# Altium PCB PCB2.PcbDoc (part 1 of 2)
Units mil, origin at the board's own origin, x right, y up, seen from the top; angles counter-clockwise.
Board outline 3858.8 x 3858.8 mil, 4 copper layers (Top Layer, signe1, GND, Bottom Layer), stack 23.756 mil thick; 111 components, 78 nets, 389 pads, 281 vias.
Unrouted connection lines stored in the file: 91.
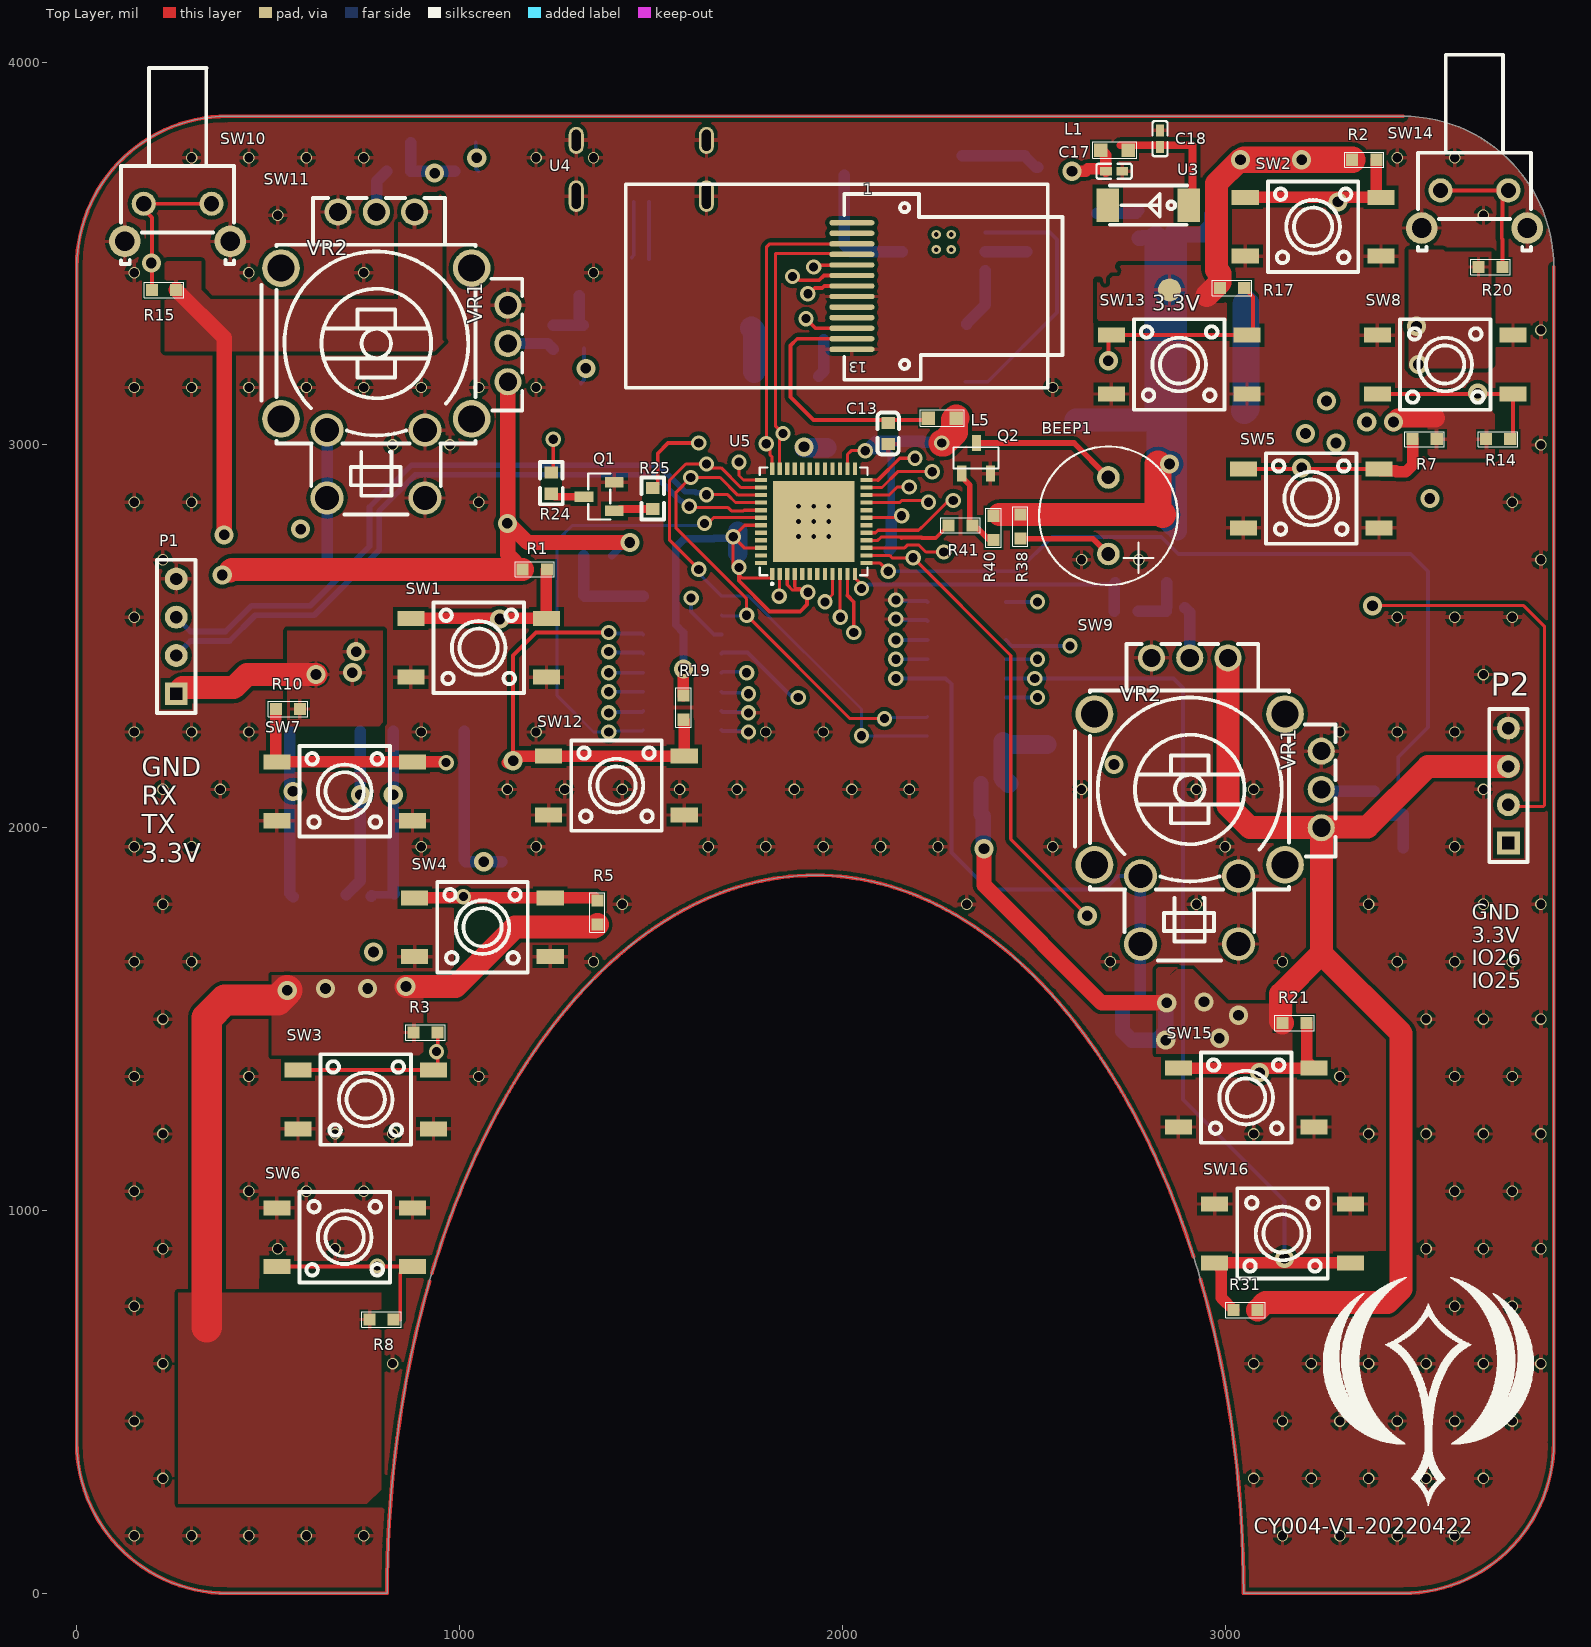
[diagram p0: Top Layer view]
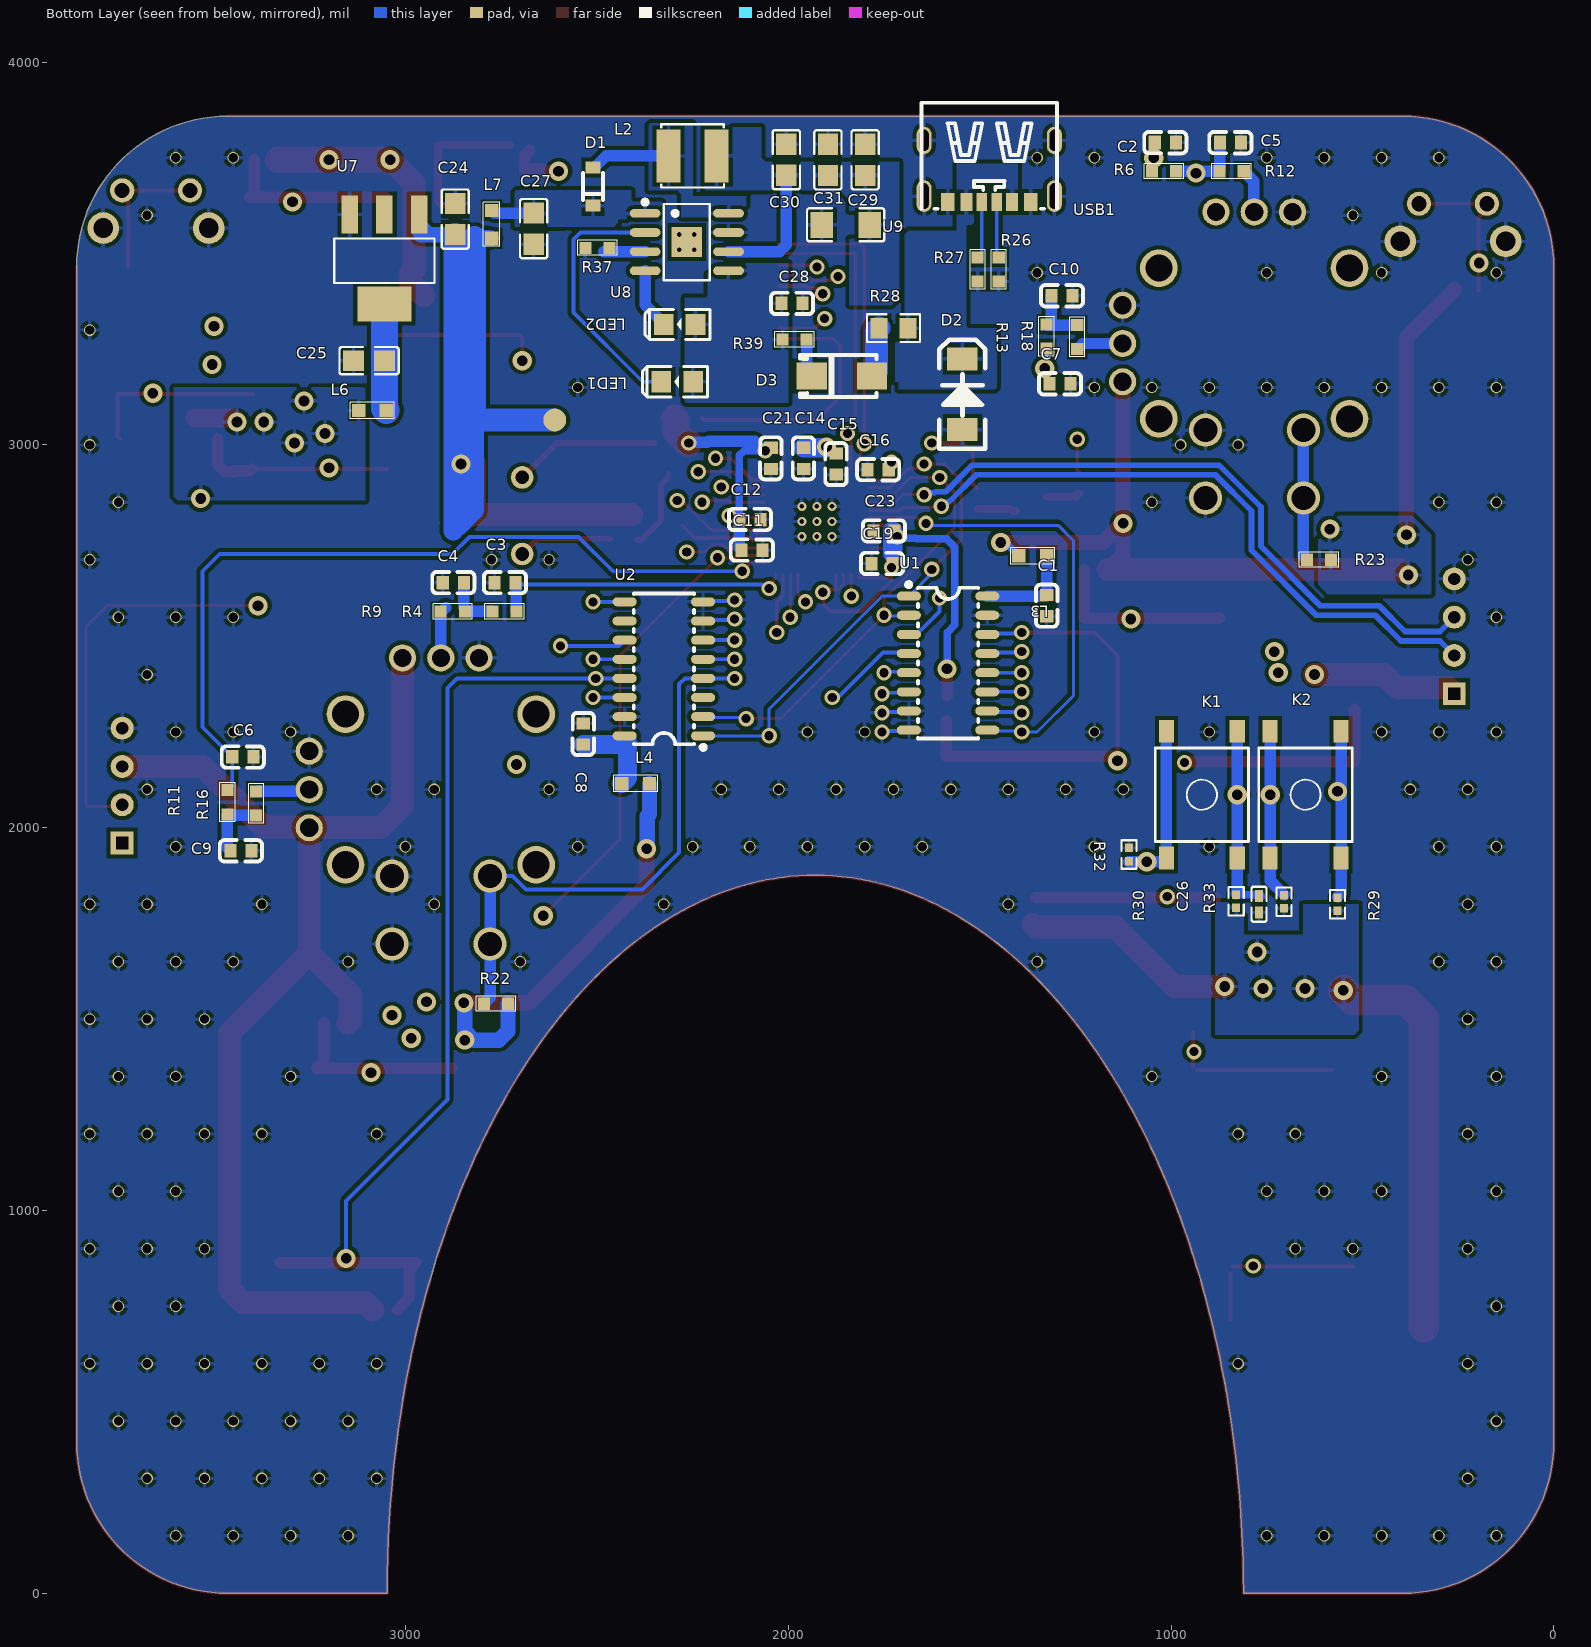
[diagram p1: Bottom Layer view, seen from below]
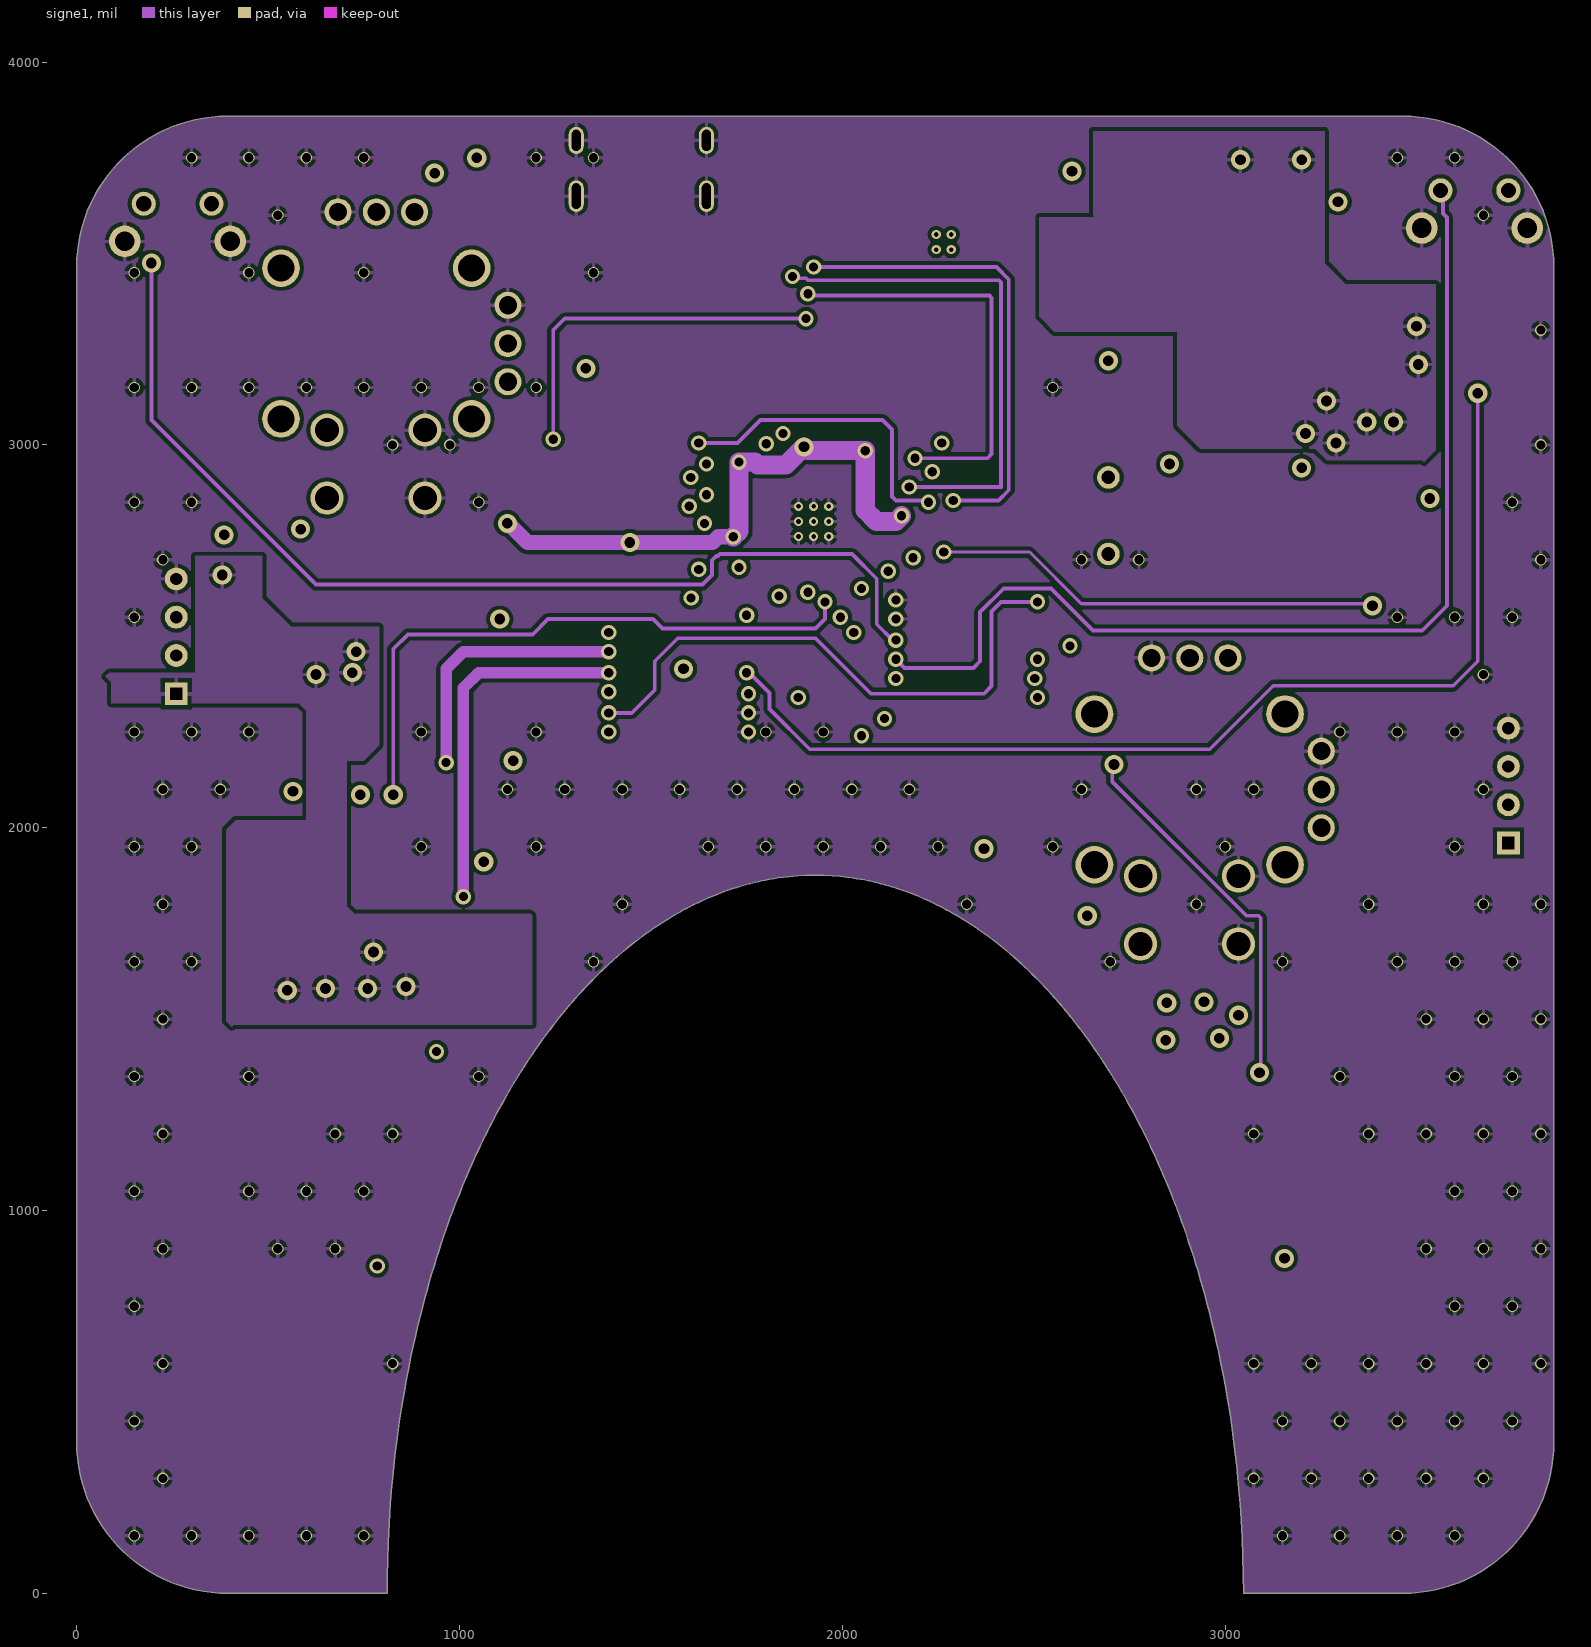
[diagram p2: signe1]
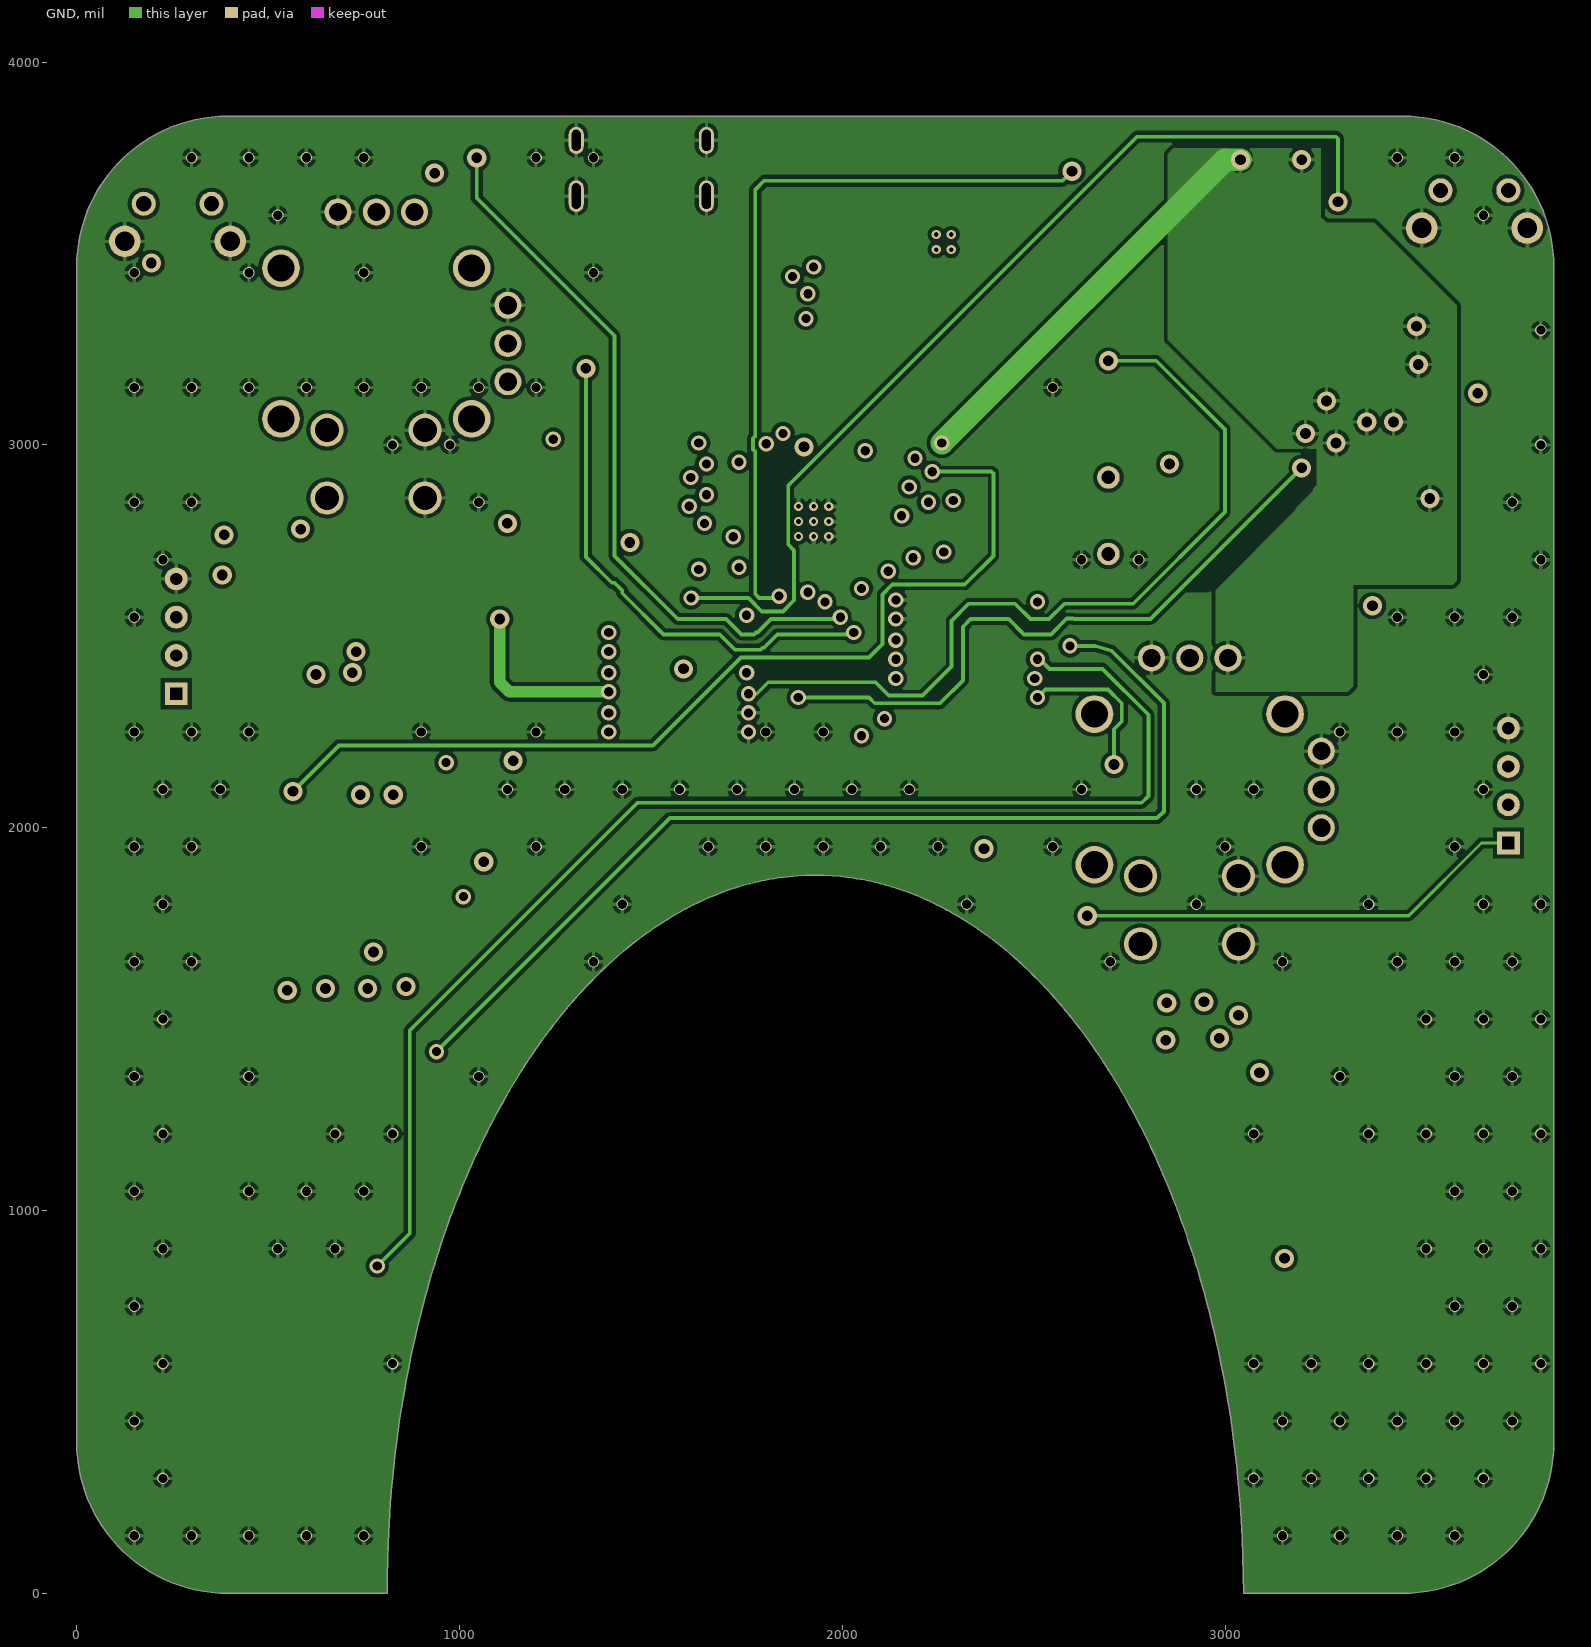
[diagram p3: GND]

## Layer stack, top to bottom
Top Solder: solder mask 0.4, Solder Resist, Dk 3.5
Top Layer: signal copper 1.4
Dielectric 2: prepreg 2.8, PP-006, Dk 4.1
signe1: signal copper 1.378
Dielectric 1: dielectric 12.6, FR-4, Dk 4.8
GND: signal copper 1.378
Dielectric 3: prepreg 2.8, PP-006, Dk 4.1
Bottom Layer: signal copper 1.4
Bottom Solder: solder mask 0.4, Solder Resist, Dk 3.5

## Board outline
739 vertices, not listed, extent -0.01,-0.02 3858.78,3858.78

## Design rules (kind name [scope] priority, off if disabled: settings)
Clearance [All] p1: gap=10 ignorepadtopadclearanceinfootprint=TRUE
PolygonConnect [All] p1: connectstyle=Relief reliefconductorwidth=10 reliefentries=4 polygonreliefangle="90 Angle" airgapwidth=10
RoutingVias [All] p1: holewidth=24 width=28 viastyle="Through Hole" minholewidth=10 minwidth=18 maxholewidth=28 maxwidth=50
SolderMaskExpansion [All] p1: expansion=4
Width [All] p1: maxlimit=100 minlimit=5 preferedwidth=8
30 further rules are at their usual default settings.

## Components (designator, comment, footprint, x,y, rotation, side; value= is the part's Value field where it differs from the comment)
BEEP1 "BEEP-9.5X5.5" BEEP-9.5X5.5 2695,2815 r90 top
C1 "C0603" C0603 1325,2580 r90 bottom
C2 "C0603" C0603 1015,3790 r180 bottom
C3 "C0603" C0603 2740,2640 r0 bottom
C4 "C0603" C0603 2875,2640 r0 bottom
C5 "C0603" C0603 845,3790 r180 bottom
C6 "C0603" C0603 3425,2185 r180 bottom
C7 "C0603" C0603 1290,3160 r180 bottom
C8 "C0603" C0603 2535,2245 r270 bottom
C9 "C0603" C0603 3430,1940 r180 bottom
C10 "C0603" C0603 1285,3390 r180 bottom
C11 "C0603" C0603 2095,2725 r0 bottom
C12 "C0603" C0603 2100,2805 r0 bottom
C13 "C0603" C0603 2120,3030 r270 top
C14 "C0603" C0603 1960,2965 r270 bottom
C15 "C0603" C0603 1875,2950 r270 bottom
C16 "C0603" C0603 1765,2935 r0 bottom
C17 "2pF" C0402 2710,3715 r180 top
C18 "2pF" C0402 2830,3800 r270 top
C19 "C0603" C0603 1755,2690 r0 bottom
C21 "C0603" C0603 2045,2965 r270 bottom
C23 "C0603" C0603 1750,2775 r0 bottom
C24 "C0805" C0805 2870,3590 r90 bottom
C25 "C0805" C0805 3095,3220 r0 bottom
C26 "C0402" C0402 770,1800 r90 bottom value=0.1UF
C27 "C0805" C0805 2665,3565 r90 bottom
C28 "C0603" C0603 1990,3370 r180 bottom
C29 "C0805" C0805 1799.13,3744.69 r90 bottom
C30 "C0805" C0805 2005,3745 r90 bottom
C31 "C0805" C0805 1896.28,3744.69 r90 bottom
D1 "1N5819" SOD-323 2510,3675 r90 bottom
D2 "SMAJ5.0CA" DO-214 1545,3040 r90 bottom
D3 "SS34_C2909963" SMA_L4.2-W2.7-LS5.0-RD 1860,3180 r180 bottom
K1 "KEY" SW6.2/6.2-SMD 919.52,2086.12 r90 bottom
K2 "KEY" SW6.2/6.2-SMD 648.43,2086.12 r90 bottom
L1 "2.4nH" L0603 2710,3770 r0 top
L2 "10uH" IND-SMD_L4.0-W4.0 2250,3755 r0 bottom
L3 "L0603" L0603 1360,2710 r0 bottom value=120R/0603
L4 "L0603" L0603 2400,2115 r180 bottom value=120R/0603
L5 "L0603" L0603 2260,3070 r0 top value=120R/0603
L6 "L0603" L0603 3085,3090 r0 bottom value=120R/0603
L7 "L0603" L0603 2775,3575 r90 bottom value=120R/0603
LED1 "BLUE" LED0805_RED 2290,3165 r0 bottom
LED2 "BLUE" LED0805_RED 2283.65,3315 r0 bottom
P1 "2.54-1*4P_JX" 2.54-1*4P_TIGHT_JX 260,2500 r90 top
P2 "2.54-1*4P_JX" 2.54-1*4P_TIGHT_JX 3740,2110 r90 top
Q1 "SS8050" SOT-23-3_L2.9-W1.3-P1.90-LS2.4-BR 1365,2865 r0 top
Q2 "S8050" SOT-23 2312,2925 r0 top
R1 "R0603" R_0603 1165,2675 r0 top value=4.7K
R2 "R0603" R_0603 3332.01,3745 r0 top value=4.7K
R3 "R0603" R_0603 880,1465 r0 top value=4.7K
R4 "R0603" R_0603 2710,2565 r0 bottom value=1K
R5 "R0603" R_0603 1360,1747.01 r90 top value=4.7K
R6 "R0603" R_0603 1050,3715 r180 bottom value=1K
R7 "R0603" R_0603 3552.99,3015 r180 top value=4.7K
R8 "R0603" R_0603 765,715 r0 top value=4.7K
R9 "R0603" R_0603 2907.99,2565 r180 bottom value=1K
R10 "R0603" R_0603 582.99,2310 r180 top value=4.7K
R11 "R0603" R_0603 3465,2097.99 r270 bottom value=1K
R12 "R0603" R_0603 810,3715 r0 bottom value=1K
R13 "R0603" R_0603 1325,3252.01 r90 bottom value=1K
R14 "R0603" R_0603 3682.01,3015 r0 top value=4.7K
R15 "R0603" R_0603 260,3405 r180 top value=4.7K
R16 "R0603" R_0603 3390,2095 r270 bottom value=1K
R17 "R0603" R_0603 2987.01,3410 r0 top value=4.7K
R18 "R0603" R_0603 1245,3250 r90 bottom value=1K
R19 "R0603" R_0603 1585,2345 r270 top value=4.7K
R20 "R0603" R_0603 3662.01,3465 r0 top value=4.7K
R21 "R0603" R_0603 3150,1490 r0 top value=4.7K
R22 "R0603" R_0603 2795,1540 r180 bottom value=1K
R23 "R0603" R_0603 645,2700 r180 bottom value=1K
R24 "10R" R0603 1240,2900 r270 top
R25 "1K" R0603 1505,2860 r270 top
R26 "R0603" R_0603 1450,3427.01 r90 bottom value=5.1K/NC
R27 "R0603" R_0603 1505,3427.01 r90 bottom value=5.1K/NC
R28 "R0603" R0805 1725,3305 r180 bottom value=1K
R29 "R0402" R0402 565,1800 r270 bottom
R30 "R0402" R0402 830,1807.96 r270 bottom
R31 "R0603" R_0603 3085,740 r180 top value=4.7K
R32 "R0402" R0402 1110,1930 r270 bottom
R33 "R0402" R0402 704.63,1806.33 r90 bottom
R37 "R0603" R_0603 2530,3515 r180 bottom value=1K
R38 "R0603" R_0603 2465,2755 r90 top value=1K
R39 "R0603" R_0603 1952.01,3275 r0 bottom value=1K
R40 "R0603" R_0603 2395,2752.01 r90 top value=1K
R41 "R0603" R_0603 2277.01,2790 r0 top value=1K
SW1 "K2-6639SP-C4SC-04" KEY-SMD_4P-L6.0-W6.0-P3.90-LS10.0 1050,2470 r0 top
SW2 "K2-6639SP-C4SC-04" KEY-SMD_4P-L6.0-W6.0-P3.90-LS10.0 3230,3570 r0 top
SW3 "K2-6639SP-C4SC-04" KEY-SMD_4P-L6.0-W6.0-P3.90-LS10.0 755,1290 r0 top
SW4 "K2-6639SP-C4SC-04" KEY-SMD_4P-L6.0-W6.0-P3.90-LS10.0 1060,1740 r0 top
SW5 "K2-6639SP-C4SC-04" KEY-SMD_4P-L6.0-W6.0-P3.90-LS10.0 3225,2860 r0 top
SW6 "K2-6639SP-C4SC-04" KEY-SMD_4P-L6.0-W6.0-P3.90-LS10.0 700,930 r180 top
SW7 "K2-6639SP-C4SC-04" KEY-SMD_4P-L6.0-W6.0-P3.90-LS10.0 700,2095 r0 top
SW8 "K2-6639SP-C4SC-04" KEY-SMD_4P-L6.0-W6.0-P3.90-LS10.0 3575,3210 r180 top
SW9 "THB001P" SW-TH_THB001P 2955,2070 r0 top
SW10 "K2-6639SP-C4SC-04" SW-TH_KH-6X6X9H-ZJ 263.58,3580.79 r180 top
SW11 "THB001P" SW-TH_THB001P 830,3235 r0 top
SW12 "K2-6639SP-C4SC-04" KEY-SMD_4P-L6.0-W6.0-P3.90-LS10.0 1410,2110 r0 top
SW13 "K2-6639SP-C4SC-04" KEY-SMD_4P-L6.0-W6.0-P3.90-LS10.0 2880,3210 r0 top
SW14 "K2-6639SP-C4SC-04" SW-TH_KH-6X6X9H-ZJ 3651.41,3615.79 r180 top
SW15 "K2-6639SP-C4SC-04" KEY-SMD_4P-L6.0-W6.0-P3.90-LS10.0 3055,1295 r0 top
SW16 "K2-6639SP-C4SC-04" KEY-SMD_4P-L6.0-W6.0-P3.90-LS10.0 3150,940 r180 top
U1 "74HC165N" SOP-16_L9.9-W3.9-P1.27-LS6.1-BL 1582.36,2430 r270 bottom
U2 "74HC165N" SOP-16_L9.9-W3.9-P1.27-LS6.1-BL 2325,2415 r90 bottom
U3 "CA-C03" ANT2051 2799.43,3626.18 r180 top
U4 "0.96 TFT" "0.96 LCD" 2025,3415.12 r180 top
U5 "ESP32-PICO-D4" QFN-48_L7.0-W7.0-P0.50-BL-EP5.4 1925,2800 r0 top
U7 "AMS1117-3.3" SOT-223-3_L6.5-W3.4-P2.30-LS7.0-BR 3055,3485 r90 bottom
U8 "TP5400" SOIC-8_L5.0-W4.0-P1.27-LS6.0-BL-EP2.0 2265,3530 r270 bottom
U9 "BAT" C1206 1850,3575 r0 bottom
USB1 "TYPE-C-31-M-16" TYPE-C-SMD_TYPE-C-31-M-16 1475,3715 r0 bottom

## Footprints (in the part's own frame and the unit in brackets; to place one, negate y for a bottom-side part, rotate by r counter-clockwise, add the part's x,y. Pads: shape width x height; smd on the part's side, far side on the other; paste and mask are expansions set on the pad)
"0.96 LCD" [mm]
  oval 3x0.35 smd: 1(0,-4.2) 2(0,-3.5) 3(0,-2.8) 4(0,-2.1) 5(0,-1.4) 6(0,-0.7) 7(0,0) 8(0,0.7) 9(0,1.4) 10(0,2.1) 11(0,2.8) 12(0,3.5) 13(0,4.2)
  silkscreen extent -13.97,-6.75 15,6.75
2.54-1*4P_TIGHT_JX [mm]
  rect 1.52x1.52 hole 0.81 square: 1(-3.81,0)
  round 1.52 hole 0.81: 2(-1.27,0) 3(1.27,0) 4(3.81,0)
  silkscreen extent -5.08,-1.27 5.08,1.27
ANT2051 [mm]
  rect 1.5x2.2 smd: 1(-2.69,0) 2(2.69,0)
  silkscreen extent -2.56,-1.3 2.55,1.3
BEEP-9.5X5.5 [mm]
  round 1.5 hole 0.9: 1(-2.54,0) 2(2.54,0)
  silkscreen extent -4.6,-4.6 4.6,4.6
C0402 [mm]
  rect 0.79x0.54 smd: 1(-0.545,0) 2(0.545,0)
  silkscreen extent -1.17,-0.5 1.17,0.5
C0603 [mm]
  rect 0.8x0.9 smd: 1(0.7,0) 2(-0.7,0)
  silkscreen extent -1.4,-0.72 1.4,0.7
C0805 [mm]
  rect 1.41x1.35 smd: 1(-1.03,0) 2(1.03,0)
  silkscreen extent -1.96,-0.9 1.96,0.9
C1206 [mm]
  rect 1.485x1.728 smd: 1(-1.593,0) 2(1.593,0)
  silkscreen extent -2.56,-1.09 2.56,1.09
DO-214 [mil]
  rect 60x80 smd: 1(0,0) 2(185,0)
  silkscreen extent -50,-60 235,60
IND-SMD_L4.0-W4.0 [mm]
  rect 1.6x3.5 smd: 1(-1.6,0) 2(1.6,0)
  silkscreen extent -2.08,-2.1 2.08,2.1
KEY-SMD_4P-L6.0-W6.0-P3.90-LS10.0 [mm]
  rect 1.8x1 smd: 1(-4.5,1.95) 2(4.5,1.95) 3(-4.5,-1.95) 4(4.5,-1.95)
  silkscreen extent -3,-3 3,3
L0603 [mil]
  rect 35x35 smd: 1(-35,0) 2(37.49,0)
  silkscreen extent -56,-21 59,22
LED0805_RED [mil]
  rect 51.2x55.1 smd: 1(-41.35,0) 2(41.35,0)
  silkscreen extent -79,-39 91,39
QFN-48_L7.0-W7.0-P0.50-BL-EP5.4 [mm]
  rect 0.28x0.8 smd: 1(-2.75,-3.5) 2(-2.25,-3.5) 3(-1.75,-3.5) 4(-1.25,-3.5) 5(-0.75,-3.5) 6(-0.25,-3.5) 7(0.25,-3.5) 8(0.75,-3.5) 9(1.25,-3.5) 10(1.75,-3.5) 11(2.25,-3.5) 12(2.75,-3.5) 25(2.75,3.5) 26(2.25,3.5) 27(1.75,3.5) 28(1.25,3.5) 29(0.75,3.5) 30(0.25,3.5) 31(-0.25,3.5) 32(-0.75,3.5) 33(-1.25,3.5) 34(-1.75,3.5) 35(-2.25,3.5) 36(-2.75,3.5)
  rect 0.8x0.28 smd: 13(3.5,-2.75) 14(3.5,-2.25) 15(3.5,-1.75) 16(3.5,-1.25) 17(3.5,-0.75) 18(3.5,-0.25) 19(3.5,0.25) 20(3.5,0.75) 21(3.5,1.25) 22(3.5,1.75) 23(3.5,2.25) 24(3.5,2.75) 37(-3.5,2.75) 38(-3.5,2.25) 39(-3.5,1.75) 40(-3.5,1.25) 41(-3.5,0.75) 42(-3.5,0.25) 43(-3.5,-0.25) 44(-3.5,-0.75) 45(-3.5,-1.25) 46(-3.5,-1.75) 47(-3.5,-2.25) 48(-3.5,-2.75)
  rect 5.4x5.4 smd: 49(0,0)
  silkscreen extent -3.58,-4.21 3.58,3.58
R0402 [mm]
  rect 0.566x0.54 smd: 1(-0.433,0) 2(0.433,0)
  silkscreen extent -0.94,-0.5 0.94,0.5
R0603 [mm]
  rect 0.8x0.9 smd: 1(0.7,0) 2(-0.7,0)
  silkscreen extent -1.4,-0.76 1.4,0.75
R0805 [mil]
  rect 44.59x54.21 smd: 1(-38.04,0) 2(38.04,0)
  silkscreen extent -69,-36 69,36
R_0603 [mm]
  rect 0.8x0.8 smd: 1(0,0) 2(1.6,0)
  silkscreen extent -0.51,-0.51 2.11,0.51
SMA_L4.2-W2.7-LS5.0-RD [mm]
  rect 2x1.8 smd: 1(-2,0) 2(2,0)
  silkscreen extent -2.79,-1.4 2.3,1.4
SOD-323 [mm]
  rect 0.8x1 smd: 1(1.27,0) 2(-1.27,0)
  silkscreen extent -0.89,-0.66 0.89,0.66
SOIC-8_L5.0-W4.0-P1.27-LS6.0-BL-EP2.0 [mm]
  oval 0.574x2.038 smd: 1(-1.905,-2.769) 2(-0.635,-2.769) 3(0.635,-2.769) 4(1.905,-2.769) 5(1.905,2.769) 6(0.635,2.769) 7(-0.635,2.769) 8(-1.905,2.769)
  rect 2x2 smd: 9(0,0)
  silkscreen extent -2.79,-2.92 2.53,1.52
SOP-16_L9.9-W3.9-P1.27-LS6.1-BL [mm]
  oval 0.6x1.6 smd: 1(-4.445,-2.6) 2(-3.175,-2.6) 3(-1.905,-2.6) 4(-0.635,-2.6) 5(0.635,-2.6) 6(1.905,-2.6) 7(3.175,-2.6) 8(4.445,-2.6) 9(4.445,2.6) 10(3.175,2.6) 11(1.905,2.6) 12(0.635,2.6) 13(-0.635,2.6) 14(-1.905,2.6) 15(-3.175,2.6) 16(-4.445,2.6)
  silkscreen extent -5.36,-2.76 5,2
SOT-23 [mm]
  rect 0.6x1.05 smd: 1(0,0) 2(1.9,0) 3(0.965,2.032)
  silkscreen extent -0.55,0.35 2.45,1.75
SOT-23-3_L2.9-W1.3-P1.90-LS2.4-BR [mm]
  rect 1.25x0.7 smd: 1(1,-0.95) 2(1,0.95) 3(-1,0)
  silkscreen extent -0.73,-1.53 0.73,1.53
SOT-223-3_L6.5-W3.4-P2.30-LS7.0-BR [mm]
  rect 2.5x1.1 smd: 1(2.97,-2.3) 2(2.97,0) 3(2.97,2.3)
  rect 2.34x3.6 smd: 4(-2.97,0)
  silkscreen extent -1.57,-3.33 1.37,3.33
SW6.2/6.2-SMD [mm]
  rect 1.5x1 smd: 1(-4.2,2.35) 2(4.2,2.35) 3(-4.2,-2.35) 4(4.2,-2.35)
  silkscreen extent -3.1,-3.1 3.1,3.1
SW-TH_KH-6X6X9H-ZJ [mm]
  round 1.6 hole 1: 1(-2.25,-1.25) 2(2.25,-1.25)
  round 2.1 hole 1.3: 3(-3.5,1.25) 4(3.5,1.25)
  silkscreen extent -3.75,-10.25 3.75,2.75
SW-TH_THB001P [mm]
  round 1.8 hole 1.2: 1(7.527,-1.78) 2(7.527,0.76) 3(7.527,3.3) 4(1.337,9.49) 5(-1.203,9.49) 6(-3.743,9.49)
  round 2.5 hole 1.8: 7(-7.527,5.76) 8(-7.527,-4.24) 9(5.123,-4.24) 10(5.123,5.76)
  round 2.2 hole 1.6: a(-4.472,-4.99) b(2.028,-4.99) c(-4.472,-9.49) d(2.028,-9.49)
  silkscreen extent -8.82,-10.58 8.48,10.42
TYPE-C-SMD_TYPE-C-31-M-16 [mm]
  oval 1x2.1 hole 0.6 slot 1.7 at 90 deg: 1(-4.32,1.65) 2(4.32,1.65)
  oval 1x1.8 hole 0.6 slot 1.4 at 90 deg: 3(-4.32,-2.05) 4(4.32,-2.05)
  rect 0.7x1.2 smd: A5(-0.5,2.05) B5(0.5,2.05)
  rect 0.8x1.2 smd: A9(1.52,2.05) B9(-1.52,2.05)
  rect 0.9x1.2 smd: A12(2.75,2.05) B12(-2.75,2.05)
  silkscreen extent -4.5,-4.55 4.5,2.49

## Part data
C1 C2 C3 C4 C5 C6 C7 C8 C9 C10 C11 C12 C13 C14 C15 C16 C19 C21 C23 C28: BOM_Manufacturer="Samsung Electro-Mechanics", BOM_Manufacturer Part=10uF, BOM_Supplier=LCSC, BOM_Supplier Part=C15415, Contributor=LCSC, nameAlias=Value, spicePre=C, spiceSymbolName=10UF
C24 C25 C27 C29 C30 C31: "Capacitor"
D1: "肖特基二极管"
D2: "500V  400W 稳压管", PCB DECAL=DO-214
D3: BOM_JLCPCB Part Class="Extended Part", BOM_Manufacturer=YONGYUTAI(ÓÀÔ, BOM_Manufacturer Part=SS34, BOM_Supplier=LCSC, BOM_Supplier Part=C2909963, Contributor=LCSC, spicePre=D, spiceSymbolName=SS34_C2909963
L2: BOM_JLCPCB Part Class="Extended Part", BOM_Manufacturer=Sunlord, BOM_Manufacturer Part=SWPA4030S100MT, BOM_Supplier=LCSC, BOM_Supplier Part=C38117, nameAlias=Inductance, spicePre=L, spiceSymbolName=SWPA4030S100MT
L3 L4 L5 L6 L7: "0603,BEAD", Manufacturer #1 PN=BEAD, PCB DECAL=L0603
LED1 LED2: library part LED_B
Q1: BOM_JLCPCB Part Class="Extended Part", BOM_Manufacturer=FUXINSEMI, BOM_Manufacturer Part=SS8050, BOM_Supplier=LCSC, BOM_Supplier Part=C908250, Contributor=LCSC, spicePre=Q, spiceSymbolName=SS8050
Q2: "NPN", Manufacturer #2=8050, PCB DECAL=SOT-23
R24 R25: BOM_JLCPCB Part Class="Extended Part", BOM_Manufacturer=UniOhm, BOM_Manufacturer Part=0603WAJ0000T5E, BOM_Supplier=LCSC, BOM_Supplier Part=C15402, nameAlias="Resistance (Ohms)", spicePre=R, spiceSymbolName=0603WAJ0000T5E
SW1 SW2 SW3 SW4 SW5 SW6 SW7 SW8 SW10 SW12 SW13 SW14 SW15 SW16: BOM_JLCPCB Part Class="Extended Part", BOM_Manufacturer=HRO, BOM_Manufacturer Part=K2-6639SP-C4SC-04, BOM_Supplier=LCSC, BOM_Supplier Part=C83206, spicePre=S, spiceSymbolName=K2-6639SP-C4SC-04
SW9 SW11: "摇杆开关", BOM_JLCPCB Part Class="Extended Part", BOM_Manufacturer=C&K, BOM_Manufacturer Part=THB001P, BOM_Supplier=LCSC, BOM_Supplier Part=C2685355, Contributor=LCSC, spicePre=S, spiceSymbolName=THB001P
U1 U2: "8位并行输入 输出寄存器", BOM_JLCPCB Part Class="Extended Part", BOM_Manufacturer=HGSEMI, BOM_Manufacturer Part=74HC165N, BOM_Supplier=LCSC, BOM_Supplier Part=C507183, Contributor=LCSC, spicePre=U, spiceSymbolName=74HC165N
U5: BOM_JLCPCB Part Class="Extended Part", BOM_Manufacturer="Espressif Systems", Frequency=-, BOM_Manufacturer Part=ESP32-PICO-D4, BOM_Supplier=LCSC, BOM_Supplier Part=C193707, Contributor=LCSC, spicePre=U, spiceSymbolName=ESP32-PICO-D4
U7: "LDO 800mA", BOM_JLCPCB Part Class="Basic Part", BOM_Manufacturer=AMS, BOM_Manufacturer Part=AMS1117-3.3, BOM_Supplier=LCSC, BOM_Supplier Part=C6186, sourceId=dwIGgezVh, spicePre=U, spiceSymbolName=AMS1117-3.3, timeStamp=1476261164
U8: "锂电池充放电", BOM_JLCPCB Part Class="Extended Part", BOM_Manufacturer=TOPPOWER, BOM_Manufacturer Part=TP5400, BOM_Supplier=LCSC, BOM_Supplier Part=C24154, spicePre=U, spiceSymbolName=TP5400
USB1: BOM_JLCPCB Part Class="Extended Part", BOM_Manufacturer="Korean Hroparts Elec", BOM_Manufacturer Part=TYPE-C-31-M-16, BOM_Supplier=LCSC, BOM_Supplier Part=C283541, Contributor=LCSC, spicePre=U, spiceSymbolName=TYPE-C-31-M-16
BEEP1: PCB DECAL=BEEP-9.5X5.5
C17 C18: Contributor=LCEDA_Lib, nameAlias=Value(F), spicePre=C, spiceSymbolName=C_0402_US
C26: PCB DECAL=CAP_0603_FIRE
K1 K2: Manufacturer #1 PN=KEY, PCB DECAL=SW6.2/6.2-SMD
L1: Contributor=LCEDA_Lib, nameAlias=Value(H), spicePre=L, spiceSymbolName=L0402_US
P1 P2: BOM_Supplier=LCSC, BOM_Supplier Part=C115245, spicePre=P, spiceSymbolName=2.54-1*4P_JX
R1 R2 R3 R4 R5 R6 R7 R8 R9 R10 R11 R12 R13 R14 R15 R16 R17 R18 R19 R20 R21 R22 R23 R26 R27 R28 R31 R37 R38 R39 R40 R41: PCB DECAL=R_0603
U3: Contributor=BVREAVE, link=https://item.taobao.com/item.htm?spm=a230r.1.14.4.81c453c0MSMjjx&id=627328734225&ns=1&abbucket=1#detail, spicePre=U, spiceSymbolName=ANT_CrossAir_CA-C03
U4: Contributor=FJ956391150, spicePre=U, spiceSymbolName="0.96 TFT"

## Free pads (board coordinates)
  round 60 smd: 2(2855,3405)
  round 60 smd far side: 3(2610,3065)

## Via types
v1: diameter 30, hole 24, Top Layer to Bottom Layer, 153 vias
v2: diameter 40, hole 24, Top Layer to Bottom Layer, 63 vias
v3: diameter 50, hole 28, Top Layer to Bottom Layer, 52 vias
v4: diameter 24.02, hole 12, Top Layer to Bottom Layer, 9 vias
v5: diameter 24, hole 12, Top Layer to Bottom Layer, 4 vias

## Nets (pads, with @x,y where several pads share a name; then routed paths per layer and width w, separated by ;. In a path a pad name is that pad's centre, name@x,y a point inside that pad or via, vN(x,y) a via of type N, cw(c..) or ccw(c..) an arc to the next point about the centre after c; other vN are vias at no path point)
3.3V: C11.1 C12.1 C14.2 C15.2 C16.2 C19.2 C21.2 C23.2 L3.2 L4.2 L5.2 L6.2 P1.1 P2.3 pad.2 R1.1 R2.1 R3.1 R5.1 R7.1 R8.1 R10.1 R14.1 R15.1 R17.1 R19.1 R20.1 R21.1 R22.2 R23.2 R29.2 R30.2 R31.1 SW9.1 SW9.4 SW11.1 SW11.4 U5.1 U5.3 U5.4 U5.19 U5.26 U5.37 U5.43 U5.46 | length 14309.3
  Top Layer w8: v2@1715,2680 v2(1715,2760) ; v2@1730,2660.46 1737.73,2652.73 1815.21,2652.73 1816.73,2654.24 U5.1@1816.73,2662.2 ; v2(1730,2955) 1730,2919.96 1741.68,2908.28 U5.37@1787.2,2908.28 ; U5.46@1787.2,2731.11 1743.89,2731.11 v2(1715,2760) ; U5.43@1787.2,2790.16 1745.16,2790.16 v2(1715,2760) ; U5.3@1856.1,2662.2 1856.1,2634.45 1870,2620.55 1904.45,2620.55 v2(1910,2615) v2@1908,2613 ; U5.4@1875.79,2662.2 1875.79,2629.69 1880.47,2625 1891.34,2625 ; U5.26@2013.58,2937.79 2013.58,2975.31 2023.26,2985 v2(2060,2985) ; U5.19@2062.79,2809.85 2062.97,2810.03 2150.03,2810.03 v2(2155,2815)
  Top Layer w10: v2(1730,2680) 1730,2660.46 1730,2645 1810,2565 1890,2565 1908,2583 v2@1908,2613
  Top Layer w30: R19.1@1585,2345 v3(1585,2415)
  Top Layer w40: R15.1@260,3405 385,3280 v3(385,2765) ; v3(1125,2795) v3@1126.35,2795 ; SW11.1@1126.35,3164.92 v3@1126.35,2795 ; R1.1@1165,2675 1126.35,2713.65 v3@1126.35,2795 ; v3(1445,2745) 1177.71,2745 1127.71,2795 v3@1126.35,2795 ; v3(2370,1945) 2370,1850 2677.5,1542.5 v3(2847.5,1542.5)
  Top Layer w50: v3(3440,3060) 3450,3070 3550,3070
  Top Layer w60: P1.1@260,2350 275.75,2365.75 410,2365.75 444.25,2400 v3(625,2400) ; v3@400,2670 405,2675 R1.1@1165,2675 ; v3(860,1585) 990,1585 1145,1740 1352.99,1740 R5.1@1360,1747.01 ; 2952.07,3389.83 2987.01,3424.77 2987.01,3447.37 2977.4,3456.97 2977.4,3683.03 3039.38,3745 v3(3040,3745) v3@3050,3745 ; SW9.4@3007.65,2443.62 3007.65,2057.35 3065.08,1999.92 SW9.1@3251.35,1999.92 ; R31.1@3085,740 3105,760 3424.85,760 3460,795.15 3460,1462.71 3251.35,1671.35 ; R21.1@3150,1490 3145,1495 3145,1565 3251.35,1671.35 ; P2.3@3740,2160 3530,2160 3372,2002 3253.43,2002 SW9.1@3251.35,1999.92 ; 3251.35,1671.35 SW9.1@3251.35,1999.92
  Top Layer w70: v2(2260,3005) 2265,3005 2293.19,3033.19 2293.19,3065.7 L5.2@2297.49,3070 ; v3@3050,3745 v3(3200,3745) R2.1@3332.01,3745
  Top Layer w80: 340,695 340,1503.14 386.86,1550 525,1550 v3(550,1575)
  signe1 w40: v3(1125,2795) 1127.71,2795 1177.71,2745 v3(1445,2745) 1660.71,2745 1675.71,2760 v2(1715,2760)
  signe1 w50: v2(1715,2760) 1730,2775 v2(1730,2955) 1771.51,2955 1778.71,2947.8 1852.8,2947.8 v3(1900,2995) 1910,2985 v2(2060,2985) 2060,2829.29 2089.29,2800 2140,2800 v2(2155,2815)
  GND w60: v2(2260,3005) 3000,3745 v3(3040,3745)
  GND w70: SW9.4@3007.65,2443.62 SW9.4@3007.82,2443.46
  Bottom Layer w20: L3.2@1397.49,2710 v3@1426.75,2739.26 ; v3(1585,2415) 1585,2509.84 1565,2529.84 1565,2733.28 1586.72,2755 1664.01,2755 1665.18,2756.17 1711.17,2756.17 v2(1715,2760) ; C21.2@2062.71,2985 2115,2985 2127.56,2972.44 C12.1@2127.56,2805
  Bottom Layer w30: v2(2060,2985) 2062.71,2985 2087.71,3010 2208.64,3010 2211.73,3006.91 2258.09,3006.91 v2(2260,3005) ; C11.1@2122.56,2725 2122.56,2726.97 2127.56,2731.97 C12.1@2127.56,2805
  Bottom Layer w40: L4.2@2362.51,2115 2362.51,2035.19 2368.09,2029.62 2368.09,1946.91 v3(2370,1945) ; R22.2@2732.01,1540 2732.01,1468.43 2755.44,1445 2821.57,1445 2845,1468.43 2845,1540 v3(2847.5,1542.5) v3@2850,1545
  Bottom Layer w50: 1726.81,2716.81 C23.2@1726.81,2775 ; v3@1900,2992.56 C14.2@1960,2992.56
  other v3: 2845,1445 2985,1450 3035,1510 2945,1545 650,1580 760,1580 775,1675 720,2405 730,2460 380,2660 585,2780 3535,2860 3290,3005 3210,3030 3370,3060 3265,3115 3505,3210 3500,3310
5.0V: C24.1 L7.1 pad.3 R38.2 R40.2 U7.1 | length 2541.1
  Top Layer w60: R40.2@2410,2817.99 R38.2@2465,2817.99 2837.01,2817.99
  Top Layer w70: 2825,2950 2825,2830 2837.01,2817.99
  Bottom Layer w40: L7.1@2775,3540 2781.73,3540 2783.43,3541.69 2820,3541.69 ; C24.1@2870,3549.45 2960.55,3549.45 2952.8,3557.2 2947.28,3557.2 2964.45,3574.37 U7.1@2964.45,3601.93
  Bottom Layer w50: 2864.92,2791.35 2875,2801.43 2875,3090 2870,3085 ; 2875,2775 2875,2791.35
  Bottom Layer w60: pad.3@2610,3065 2820,3065 ; 2820,3541.69 2820,3065 ; 2864.92,2791.35 2825,2831.26 2825,3065 2820,3065 ; 2870,3085 C24.1@2870,3549.45
  other v3: 2855,2950
GND: C1.2 C2.1 C3.1 C4.1 C5.1 C6.1 C7.1 C8.2 C9.1 C10.1 C11.2 C12.2 C13.1 C14.1 C15.1 C16.1 C17.1 C18.1 C19.1 C21.1 C23.1 C24.2 C25.2 C26.1 C27.1 C28.1 C29.2 C30.2 C31.2 D2.1 P1.4 P2.4 Q1.2 Q2.2 R26.1 R27.1 R32.1 R33.1 R37.1 SW1.3 SW1.4 SW2.3 SW2.4 SW3.3 SW3.4 SW4.3 SW4.4 SW5.3 SW5.4 SW6.3 SW6.4 SW7.3 SW7.4 SW8.3 SW8.4 SW9.3 SW9.6 SW9.b SW9.d SW10.3 SW10.4 SW11.3 SW11.6 SW11.b SW11.d SW12.3 SW12.4 SW13.3 SW13.4 SW14.3 SW14.4 SW15.3 SW15.4 SW16.3 SW16.4 U1.7 U1.8 U1.15 U2.7 U2.8 U2.15 U4.8 U4.13 U5.49 U7.3 U8.7 U9.2 USB1.1 USB1.2 USB1.3 USB1.4 USB1.A12 USB1.B12 | length 5883.7
  Top Layer w10: -0.01,3464.82 -0.01,393.95 ccw(c393.95,393.95) 393.95,-0.01 810.36,-0.01 ; 813.38,131.97 cw(c3926.17,1.34) 819.3,233.38 cw(c3893.43,3.75) 825.25,302.6 cw(c3861.65,6.83) 831.2,358.3 837.09,405.79 842.93,447.77 848.95,486.98 855.02,523.39 861.04,556.97 866.91,587.73 873.13,618.42 ; 873.13,618.43 879.08,646.28 885.31,674.08 ; 885.31,674.07 891.16,699.02 ; 891.16,699.03 897.24,723.9 903.55,748.7 909.35,770.67 915.34,792.56 921.5,814.38 ; 927.85,836.11 933.55,855.04 939.39,873.89 945.37,892.67 951.48,911.37 957.73,929.98 964.12,948.49 970.64,966.91 976.34,982.61 982.13,998.24 988.03,1013.79 994.01,1029.26 1000.1,1044.65 1006.28,1059.95 1012.56,1075.16 1018.93,1090.28 ; 1018.93,1090.27 1025.4,1105.3 1031.96,1120.23 1038.61,1135.06 1044.23,1147.34 1049.9,1159.54 1055.64,1171.68 1061.45,1183.74 1067.31,1195.73 1073.23,1207.64 1079.22,1219.47 1085.26,1231.21 1091.37,1242.88 1097.53,1254.48 ; 1097.53,1254.47 1103.76,1265.98 1110.04,1277.4 1116.37,1288.73 1122.77,1299.98 1129.22,1311.13 1135.72,1322.21 1142.28,1333.19 1148.9,1344.07 1155.56,1354.87 1162.28,1365.56 1169.05,1376.17 1175.87,1386.68 1182.75,1397.09 1189.67,1407.4 1196.64,1417.62 1203.66,1427.73 1209.3,1435.75 1214.98,1443.7 1220.69,1451.59 1226.43,1459.42 1232.2,1467.17 1237.99,1474.86 1243.82,1482.48 1249.67,1490.04 1255.54,1497.52 1261.44,1504.93 1267.37,1512.28 1273.33,1519.57
  Bottom Layer w10: U1.8@1684.73,2255 1687.23,2252.5 1752.5,2252.5 v2(1755,2250) ; U1.7@1684.73,2305 1687.23,2302.5 1752.5,2302.5 v2(1755,2300) ; v2(2140,2545) 2142.5,2542.5 2220.14,2542.5 U2.7@2222.63,2540 ; v2(2140,2595) 2142.5,2592.5 2220.14,2592.5 U2.8@2222.63,2590
  other v1: 150,150 300,150 450,150 600,150 750,150 3150,150 3300,150 3450,150 3600,150 225,300 3075,300 3225,300 3375,300 3525,300 3675,300 150,450 3150,450 3300,450 3450,450 3600,450 3750,450 225,600 825,600 3075,600 3225,600 3375,600 3525,600 3675,600 3825,600 150,750 3600,750 3750,750 225,900 525,900 675,900 3525,900 3675,900 3825,900 150,1050 450,1050 600,1050 750,1050 3600,1050 3750,1050 225,1200 675,1200 825,1200 3075,1200 3375,1200 3525,1200 3675,1200 3825,1200 150,1350 450,1350 1050,1350 3300,1350 3600,1350 3750,1350 225,1500 3525,1500 3675,1500 3825,1500 150,1650 300,1650 1350,1650 2700,1650 3150,1650 3450,1650 3600,1650 3750,1650 225,1800 1425,1800 2325,1800 2925,1800 3375,1800 3675,1800 3825,1800 150,1950 300,1950 900,1950 1200,1950 1650,1950 1800,1950 1950,1950 2100,1950 2250,1950 2550,1950 3000,1950 3600,1950 225,2100 375,2100 1125,2100 1275,2100 1425,2100 1575,2100 1725,2100 1875,2100 2025,2100 2175,2100 2625,2100 2925,2100 3075,2100 3675,2100 150,2250 300,2250 450,2250 900,2250 1200,2250 1800,2250 1950,2250 3300,2250 3450,2250 3600,2250 3675,2400 150,2550 3450,2550 3600,2550 3750,2550 225,2700 2625,2700 2775,2700 3825,2700 150,2850 300,2850 1050,2850 3750,2850 825,3000 975,3000 3825,3000 150,3150 300,3150 450,3150 600,3150 750,3150 900,3150 1050,3150 1200,3150 2550,3150 3825,3300 150,3450 450,3450 750,3450 1350,3450 525,3600 3675,3600 300,3750 450,3750 600,3750 750,3750 1200,3750 1350,3750 3450,3750 3600,3750
  other v4: 1885.62,2760.62 1924.99,2760.62 1964.37,2760.62 1885.62,2800.01 1924.99,2800.01 1964.37,2800.01 1885.63,2839.38 1924.99,2839.38 1964.38,2839.38
NetBEEP1_1: BEEP1.1 R38.1 | length 246.6
  Top Layer w15: R38.1@2465,2755 2655,2755 BEEP1.1@2695,2715
NetBEEP1_2: BEEP1.2 Q2.3 | length 382.3
  Top Layer w15: Q2.3@2350,3005 2605,3005 BEEP1.2@2695,2915
NetC1_1: C1.1 L3.1 U1.16 | length 258.5
  Bottom Layer w30: L3.1@1325,2710 C1.1@1325,2607.56 1327.56,2605 U1.16@1480,2605
NetC2_2: C2.2 R6.1 U5.10 | length 2073.4
  Top Layer w8: v2@1993.9,2551.1 U5.10@1993.9,2662.2
  Top Layer w10: v2@1993.9,2551.1 v2(1995,2550)
  GND w10: v3(1045,3750) 1045,3645 1405,3285 1405,2710 1570,2545 1696.36,2545 1736.36,2505 1769.79,2505 1774.79,2510 1778.64,2510 1813.64,2545 1973.64,2545 1976.73,2548.09 1993.09,2548.09 v2(1995,2550)
  Bottom Layer w10: C2.2@1042.56,3790 1042.56,3722.44 R6.1@1050,3715
NetC3_2: C3.2 R4.1 U5.12 | length 788.8
  Top Layer w8: U5.12@2033.27,2662.2 2033.27,2651.97 2043.88,2641.36 2043.88,2631.12 v2(2050,2625)
  Bottom Layer w10: v2(2050,2625) 2058.12,2625 2068.12,2635 2707.44,2635 C3.2@2712.44,2640
  Bottom Layer w30: R4.1@2710,2565 2710,2635.59 2712.44,2638.03 C3.2@2712.44,2640
NetC4_2: C4.2 R4.2 R9.2 | length 148
  Bottom Layer w30: R4.2@2772.99,2565 R9.2@2845,2565 2845.75,2565.75 2845.75,2575.59 2847.44,2577.28 C4.2@2847.44,2640
NetC5_2: C5.2 R6.2 R12.2 | length 191.7
  GND w30: v3(935,3710) v3@936.74,3708.26
  Bottom Layer w10: R12.2@872.56,3715.43 R12.2@872.99,3715
  Bottom Layer w30: R12.2@872.56,3715.43 C5.2@872.56,3790 ; R12.2@872.99,3715 R6.2@987.01,3715
NetC6_2: C6.2 R11.1 U5.13 | length 2159.6
  Top Layer w8: U5.13@2062.79,2691.74 2063.53,2691 2099,2691 v2(2120,2670)
  Bottom Layer w10: v2(2120,2670) 2458.14,2670 2547.66,2759.53 2833.1,2759.53 2877.62,2715 3485,2715 3530,2670 3530,2262.44 C6.2@3452.56,2185 3452.56,2110.43 R11.1@3465,2097.99
NetC7_2: C7.2 R13.1 U5.11 | length 1569.7
  Top Layer w8: 2013.58,2606.42 U5.11@2013.58,2662.2
  Top Layer w10: 2013.58,2606.42 2030,2590 v2(2030,2510)
  GND w10: v3(1330,3200) 1330,2707.57 1397.57,2640 1404.5,2640 1425,2619.5 1425,2612.57 1532.57,2505 1679.79,2505 1719.79,2465 1786.36,2465 1791.36,2470 1795.21,2470 1830.21,2505 2025,2505 v2(2030,2510)
  Bottom Layer w10: C7.2@1317.56,3160 1317.56,3161.97 1325,3169.41 R13.1@1325,3252.01
NetC8_1: C8.1 L4.1 U2.16 | length 234.3
  Bottom Layer w50: L4.1@2435,2115 2420,2130 2420,2225 2427.56,2217.44 C8.1@2535,2217.44
NetC9_2: C9.2 R11.2 R16.2 | length 174.3
  Bottom Layer w10: C9.2@3457.56,1940 C9.2@3465,1947.44 ; R11.2@3462.01,2032.01 R11.2@3465,2035
  Bottom Layer w30: R16.2@3390,2032.01 R11.2@3462.01,2032.01 ; C9.2@3465,1947.44 R11.2@3465,2035
NetC10_2: C10.2 R13.2 R18.2 | length 161
  Bottom Layer w10: R13.2@1312.56,3327.44 R13.2@1325,3315 R13.2@1322.99,3312.99
  Bottom Layer w30: R18.2@1245,3312.99 R13.2@1322.99,3312.99 ; R13.2@1312.56,3327.44 C10.2@1312.56,3390
NetC13_2: C13.2 L5.1 U4.12 | length 689.1
  Top Layer w10: U4.12@2025,3277.32 1882.32,3277.32 1865,3260 1865,3125 1925,3065 2220,3065 L5.1@2225,3070
NetC17_2: C17.2 L1.1 U5.2 | length 2190
  Top Layer w8: v2(1835,2605) 1836.42,2606.42 U5.2@1836.42,2662.2
  Top Layer w30: v3(2600,3715) 2635.41,3715 2641.59,3721.18 2687.55,3721.18 C17.2@2687.55,3724.99 ; L1.1@2675,3770 2687.99,3757.01 2687.99,3715.55 C17.2@2688.54,3715
  GND w10: v2(1835,2605) 1830,2600 1782.78,2600 1772.78,2610 1772.78,2982.01 1766.49,2988.3 1766.49,3017.3 1772.78,3023.59 1772.78,3666.92 1795.86,3690 2575,3690 v3(2600,3715)
NetC18_2: C18.2 L1.2 U3.1 | length 349.6
  Top Layer w20: 2726.46,3783.28 2830,3783.28 2915,3783.28 2915,3635.84 U3.1@2905.34,3626.18
NetC25_1: C25.1 L6.1 U7.4 | length 280.1
  Bottom Layer w70: L6.1@3050,3090 3054.45,3094.45 C25.1@3054.45,3220 3054.45,3367.52 U7.4@3055,3368.07
NetC26_2: C26.2 K1.3 K1.4 R30.1 U5.9 | length 2174.2
  Top Layer w8: v2(1955,2590) 1974.21,2609.21 U5.9@1974.21,2662.2
  signe1 w10: v3(827,2086.12) 827,2467 865,2505 1191.39,2505 1231.39,2545 1505,2545 1530,2520 1930,2520 1955,2545 v2(1955,2590)
  Bottom Layer w20: C26.2@770.55,1822.01 773.54,1825 R30.1@830,1825
  Bottom Layer w30: C26.2@770,1821.46 C26.2@770.55,1822.01 ; K1.4@827,2251.47 v3(827,2086.12) K1.3@827,1920.76 827,1830.05 R30.1@830,1827.06
NetC27_2: C27.2 D1.2 L7.2 U8.1 | length 112.9
  Bottom Layer w30: C27.2@2665,3605.55 2768.07,3605.55 L7.2@2775,3612.49
NetC28_2: C28.2 LED1.1 LED2.1 R39.2 U8.5
NetC29_1: C29.1 C30.1 C31.1 L2.1 U8.6 U9.1 | length 340.1
  Bottom Layer w30: C30.1@2005,3704.45 2005,3522.57 2022.57,3505 U8.6@2155.98,3505
NetD1_1: D1.1 L2.2 U8.8 | length 209.4
  Bottom Layer w30: L2.2@2312.99,3755 2476.06,3755 2506.06,3725 D1.1@2510,3725
NetD2_2: D2.2 R28.2 USB1.A9 USB1.B9
NetD3_1: D3.1 R39.1 | length 100.5
  Bottom Layer w30: D3.1@1938.74,3180.01 1951.26,3192.52 1951.26,3274.25 R39.1@1952.01,3275
NetK1_1: K1.1 K1.2 R32.2 | length 435.8
  Bottom Layer w30: K1.2@1012.04,2251.47 K1.1@1012.04,1920.76 1012.04,1915.59 1016.73,1910.9 R32.2@1110,1910.9
  other v3: 1063.36,1910.9
NetK2_1: K2.1 K2.2 R33.2 | length 441.1
  Bottom Layer w30: R33.2@704.63,1825.42 740.95,1861.74 K2.1@740.95,1920.76 K2.2@740.95,2251.47
  other v3: 740.95,2086.12
NetK2_3: K2.3 K2.4 R29.1 U5.23 | length 3164.3
  Top Layer w8: U5.23@2062.79,2888.59 2103.59,2888.59 2146,2931 v2@2235,2931
  GND w10: v3(565,2095) 685,2215 1505,2215 1735,2445 2070,2445 2105,2480 2105,2609.5 2130.5,2635 2320,2635 2395,2710 2395,2925 2389.14,2930.86 2235.86,2930.86 v2(2235,2930)
  Bottom Layer w30: K2.4@555.91,2251.47 K2.3@555.91,1920.76 555.91,1828.18 R29.1@565,1819.1
NetLED1_2: LED1.2 U8.2 | length 699.7
  Bottom Layer w10: LED1.2@2321.35,3165 LED1.2@2331.35,3165 2380,3165 2560.75,3345.75 2560.75,3536.96 2542.71,3555 U8.2@2374.02,3555